# Altium PCB PCB1 - 副本.PcbDoc
Units mil, origin at the board's own origin, x right, y up, seen from the top; angles counter-clockwise.
Board outline 6000 x 4000 mil, 2 copper layers (Top Layer, Bottom Layer); 19 components, 9 nets, 41 pads, 0 vias.
Unrouted connection lines stored in the file: 32.
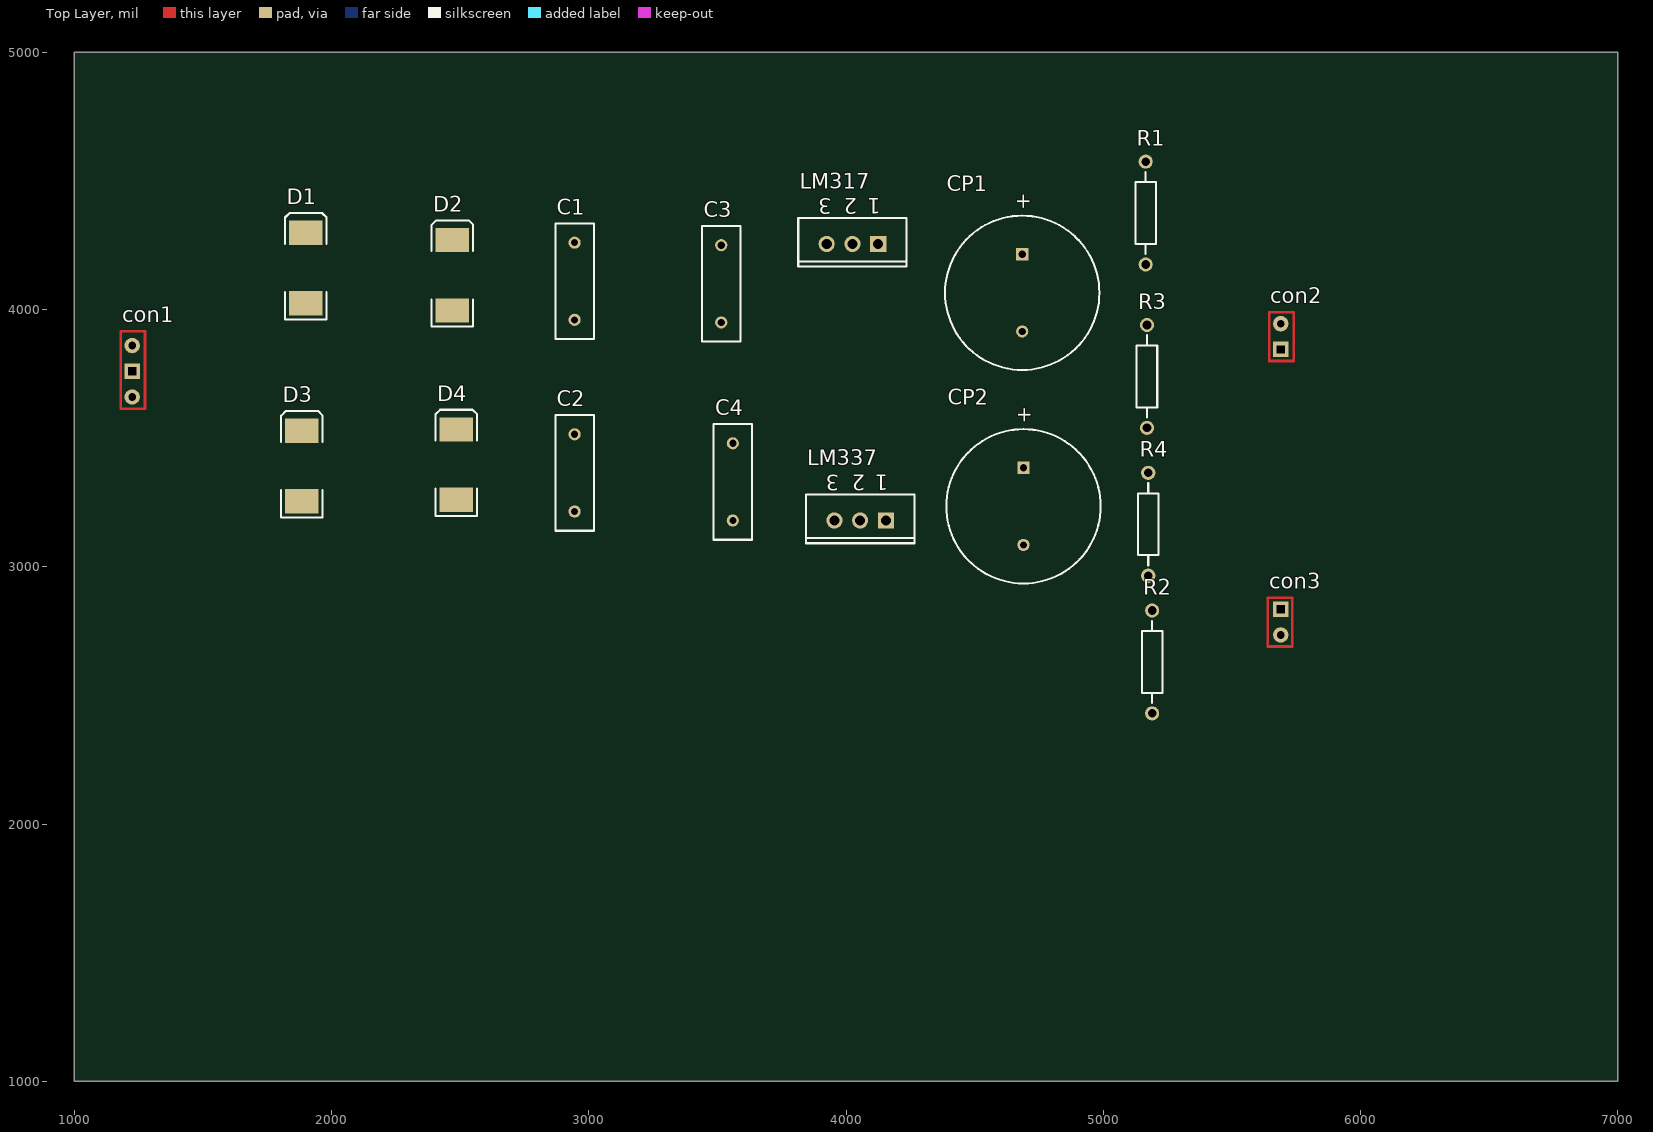
[diagram p0: Top Layer view]
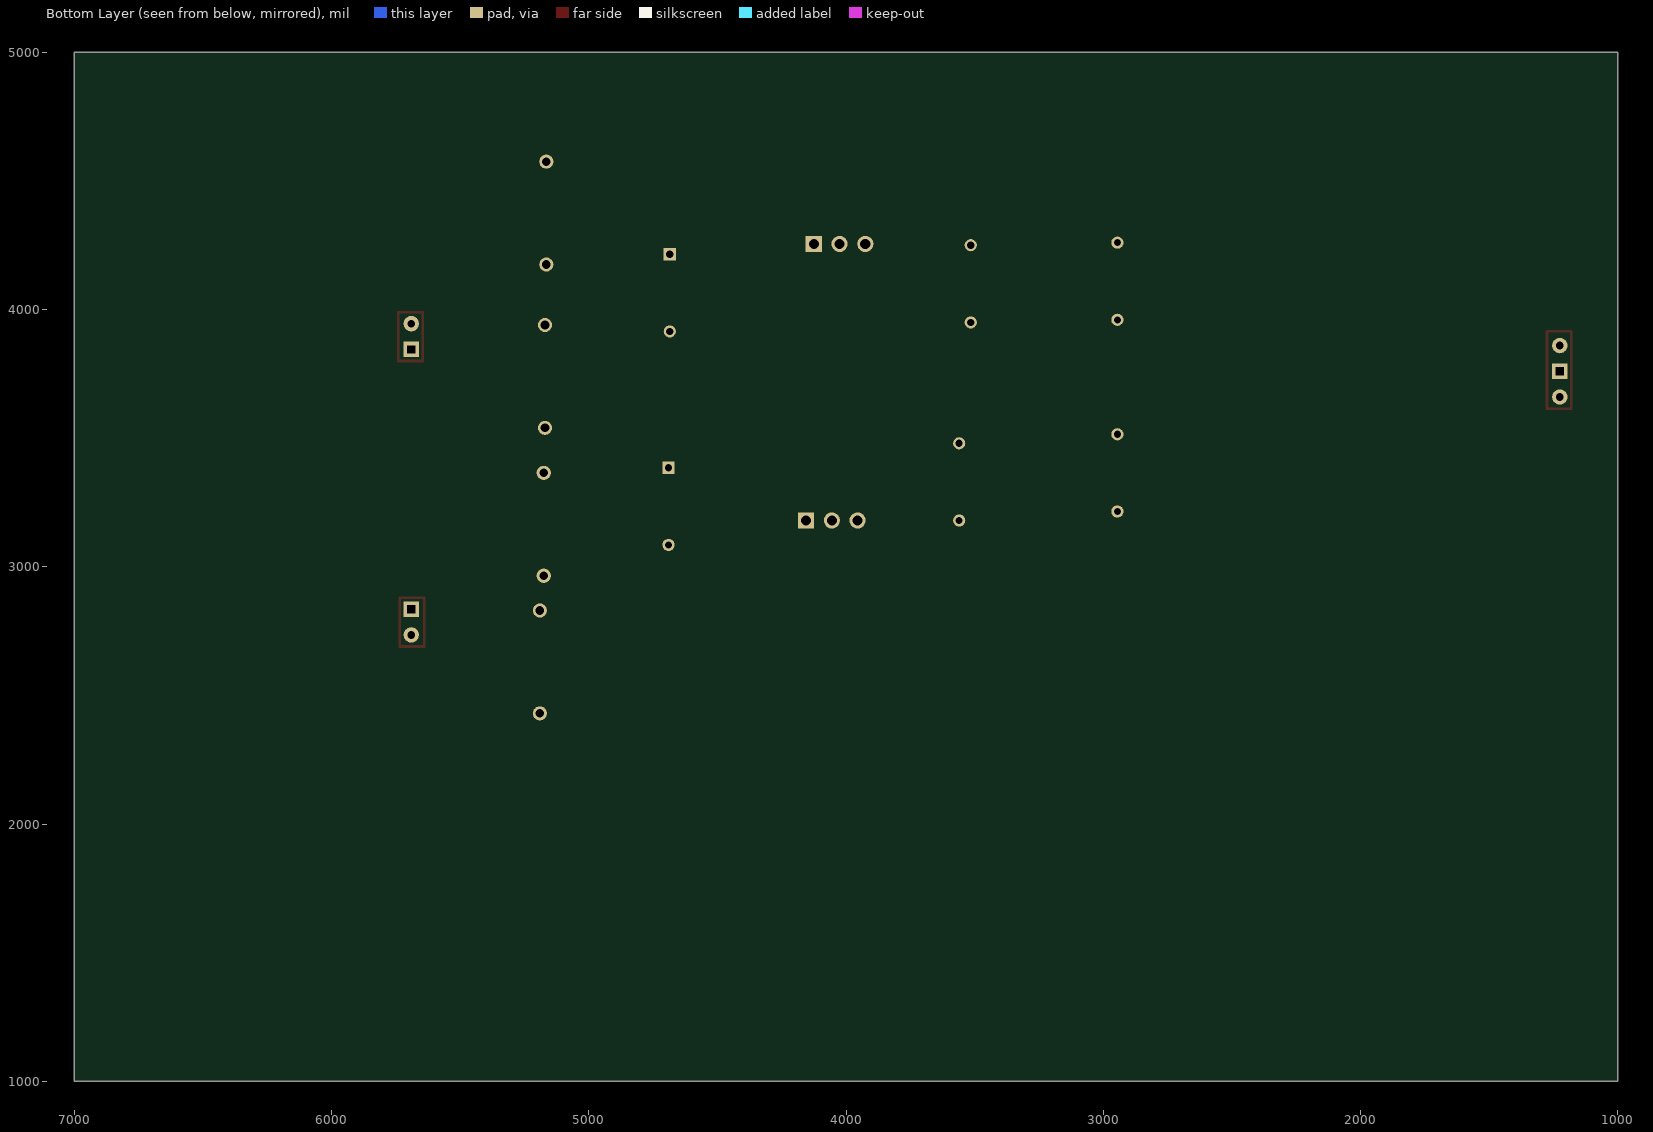
[diagram p1: Bottom Layer view, seen from below]

## Layer stack, top to bottom
Top Solder: solder mask 0.4, Solder Resist, Dk 3.5
Top Layer: signal copper 1.4
Dielectric 1: dielectric 12.6, FR-4, Dk 4.8
Bottom Layer: signal copper 1.4
Bottom Solder: solder mask 0.4, Solder Resist, Dk 3.5

## Board outline
1000,1000 7000,1000 7000,5000 1000,5000

## Design rules (kind name [scope] priority, off if disabled: settings)
Clearance [All] p1: gap=10 ignorepadtopadclearanceinfootprint=FALSE except(0: Arc-Hole Track-Hole SMDPad-Hole THPad-Hole Via-Hole Fill-Hole Poly-Hole Region-Hole Text-Hole)
PolygonConnect [All] p1: connectstyle=Relief reliefconductorwidth=10 reliefentries=4 polygonreliefangle="90 Angle" airgapwidth=10
RoomDefinition Sheet1 [InComponentClass('Sheet1')] p1: confinementstyle=ConfineIn formatcopy=TRUE lockcomponents=FALSE outline 1150,5060 6465,5060 6465,5780 1150,5780
RoutingVias [All] p1: holewidth=28 width=50 viastyle="Through Hole" minholewidth=28 minwidth=50 maxholewidth=28 maxwidth=50
SolderMaskExpansion [All] p1: expansion=4
Width [All] p1: maxlimit=100 minlimit=30 preferedwidth=30 minimp=50.000000 maximp=50.000000 favimp=50.000000
30 further rules are at their usual default settings.

## Components (designator, comment, footprint, x,y, rotation, side; value= is the part's Value field where it differs from the comment)
C1 "Cap" RAD-0.3 2945,4110 r90 top value=1000uF
C2 "Cap" RAD-0.3 2945,3365 r90 top value=1000uF
C3 "Cap" RAD-0.3 3515,4100 r90 top value=0.1uF
C4 "Cap" RAD-0.3 3560,3330 r90 top value=0.1uF
con1 "con3" con3 1225,3760 r90 top
con2 "con2" con2 5690,3945 r270 top
con3 "con2" con2 5690,2735 r90 top
CP1 "Cap Pol1" RB7.6-15 4685,4065 r90 top value=10uF
CP2 "Cap Pol1" RB7.6-15 4690,3235 r90 top value=10uF
D1 "Diode" SMC 1900,4161.81 r90 top
D2 "Diode" SMC 2470,4133.19 r90 top
D3 "Diode" SMC 1885,3391.81 r90 top
D4 "Diode" SMC 2485,3396.81 r90 top
LM317 "LM317" TO-220-AB 4025,4255 r180 top
LM337 "LM337" TO-220-AB 4055,3180 r180 top
R1 "Res2" AXIAL-0.4 5165,4375 r90 top value=200
R2 "Res2" AXIAL-0.4 5190,2630 r90 top value=200
R3 "Res2" AXIAL-0.4 5170,3740 r90 top value=600
R4 "Res2" AXIAL-0.4 5175,3165 r90 top value=600

## Footprints (in the part's own frame and the unit in brackets; to place one, negate y for a bottom-side part, rotate by r counter-clockwise, add the part's x,y. Pads: shape width x height; smd on the part's side, far side on the other; paste and mask are expansions set on the pad)
AXIAL-0.4 [mm] "Axial Device, Thru-Hole; 2 Leads; 0.4 in Pin Spacing"
  round 1.4 hole 0.85: 1(-5.08,0) 2(5.08,0)
  silkscreen extent -4.06,-1.02 4.06,1.02
con2 [mil]
  round 60 hole 30: 1(0,0)
  rect 60x60 hole 30 square: 2(100,0)
  Top Layer lines w10: 145,-45 145,50 107.5,50 12.5,50 -45,50 -45,-45 145,-45
con3 [mil]
  round 60 hole 30: 1(-100,0) 3(100,0)
  rect 60x60 hole 30 square: 2(0,0)
  Top Layer lines w10: -145,45 -145,-50 155,-50 155,45 140,45 -145,45
RAD-0.3 [mm] "Radial Cap, Thru-Hole; 2 Leads; 0.3 in Pin Spacing"
  round 1.2 hole 0.7: 1(-3.81,0) 2(3.81,0)
  silkscreen extent -5.71,-1.91 5.71,1.91
RB7.6-15 [mm] "Polarized Capacitor (Radial); 2 Leads"
  rect 1.2x1.2 hole 0.7: 1(3.81,0)
  round 1.2 hole 0.7: 2(-3.81,0)
  silkscreen extent -7.62,-7.62 7.62,7.62
SMC [mm] "DO-214-AB/SMC; 2 C-Bend Leads; Body 7.9 x 5.9 mm, inc. leads (LxW)"
  rect 2.4x3.3 smd: 1(-3.475,0) 2(3.475,0)
  silkscreen extent -5.07,-2.05 5.43,2.06
TO-220-AB [mm] "TO, Thru-Hole, Vertical, Heatsink Mounted; 3 In-Line Leads; Pitch 2.54 mm"
  rect 1.6x1.6 hole 1: 1(-2.54,0)
  round 1.6 hole 1: 2(0,0) 3(2.54,0)
  silkscreen extent -5.35,-2.55 5.35,2.25

## Part data
C1 C2 C3 C4: "Capacitor", LatestRevisionDate=17-Jul-2002, LatestRevisionNote="Re-released for DXP Platform.", PackageDescription="Radial Cap, Thru-Hole; 2 Leads; 0.3 in Pin Spacing", PackageReference=RAD-0.3, Published=8-Jun-2000, Publisher="Altium Limited"
CP1 CP2: "Polarized Capacitor (Radial)", LatestRevisionDate=17-Jul-2002, LatestRevisionNote="Re-released for DXP Platform.", PackageDescription="Polarized Capacitor (Radial); 2 Leads", PackageReference=RB7.6-15, Published=8-Jun-2000, Publisher="Altium Limited"
D1 D2 D3 D4: "Default Diode", Code_JEDEC=DO-214-AB, LatestRevisionDate=17-Jul-2002, LatestRevisionNote="Re-released for DXP Platform.", PackageDescription="DO-214-AB/SMC; 2 C-Bend Leads; Body 7.9 x 5.9 mm, inc. leads (LxW)", PackageReference=SMC, PackageVersion=Sep-1996, Published=8-Jun-2000, Publisher="Altium Limited"
R1 R2 R3 R4: "Resistor", LatestRevisionDate=17-Jul-2002, LatestRevisionNote="Re-released for DXP Platform.", PackageDescription="Axial Device, Thru-Hole; 2 Leads; 0.4 in Pin Spacing", PackageReference=AXIAL-0.4, Published=8-Jun-2000, Publisher="Altium Limited"

## Nets (pads, with @x,y where several pads share a name; then routed paths per layer and width w, separated by ;. In a path a pad name is that pad's centre, name@x,y a point inside that pad or via, vN(x,y) a via of type N, cw(c..) or ccw(c..) an arc to the next point about the centre after c; other vN are vias at no path point)
GND: C1.1 C2.2 C3.1 C4.2 con1.2 con2.2 con3.2 CP1.2 CP2.1 R3.1 R4.2
NetC1_2: C1.2 C3.2 D1.2 D2.2 LM317.3
NetC2_1: C2.1 C4.1 D3.1 D4.1 LM337.3
Netcon1_1: con1.1 D2.1 D4.2
Netcon1_3: con1.3 D1.1 D3.2
Netcon2_1: con2.1 LM317.2 R1.2
Netcon3_1: con3.1 LM337.2 R2.1
NetCP1_1: CP1.1 LM317.1 R1.1 R3.2
NetCP2_2: CP2.2 LM337.1 R2.2 R4.1

## Text inside footprints (layer, text, board x,y; h text height)
CP1: Top Overlay "+" at 4714.01,4385.15 h59.06 r90
CP2: Top Overlay "+" at 4719.01,3555.15 h59.06 r90
LM317: Top Overlay "1" at 4134.84,4433.15 h59.06 r180; Top Overlay "2" at 4044.68,4433.15 h59.06 r180; Top Overlay "3" at 3944.68,4433.15 h59.06 r180
LM337: Top Overlay "1" at 4164.84,3358.15 h59.06 r180; Top Overlay "2" at 4074.68,3358.15 h59.06 r180; Top Overlay "3" at 3974.68,3358.15 h59.06 r180